# Altium PCB POWER PCB.PcbDoc (part 1 of 2)
Units mil, origin at the board's own origin, x right, y up, seen from the top; angles counter-clockwise.
Board outline 3944.91 x 1977.9 mil, 2 copper layers (Top Layer, Bottom Layer); 41 components, 26 nets, 102 pads, 0 vias.
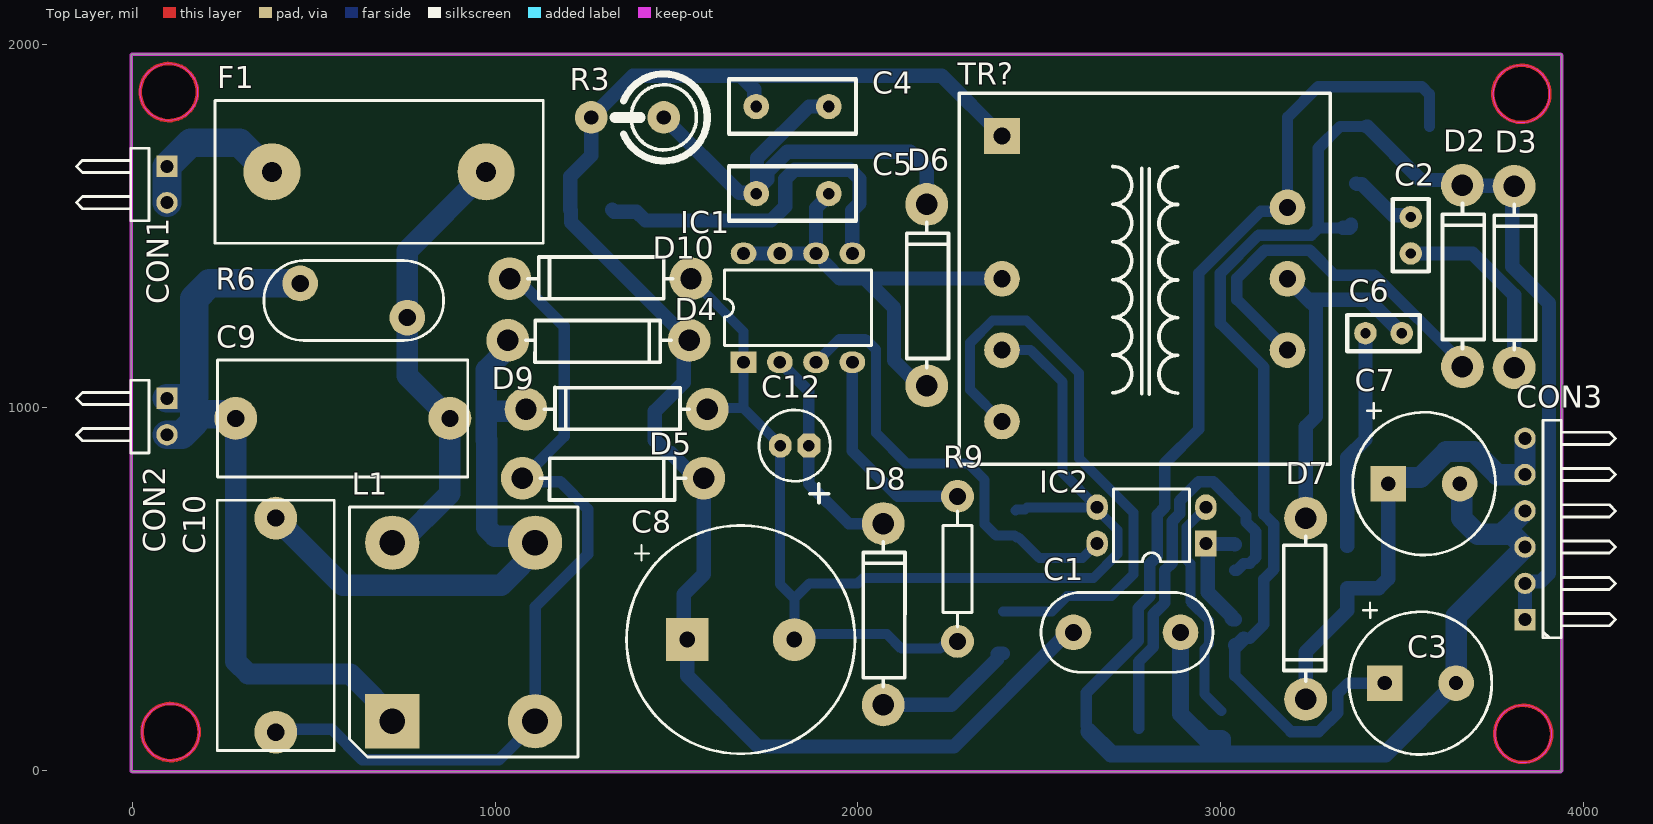
[diagram p0: Top Layer view]
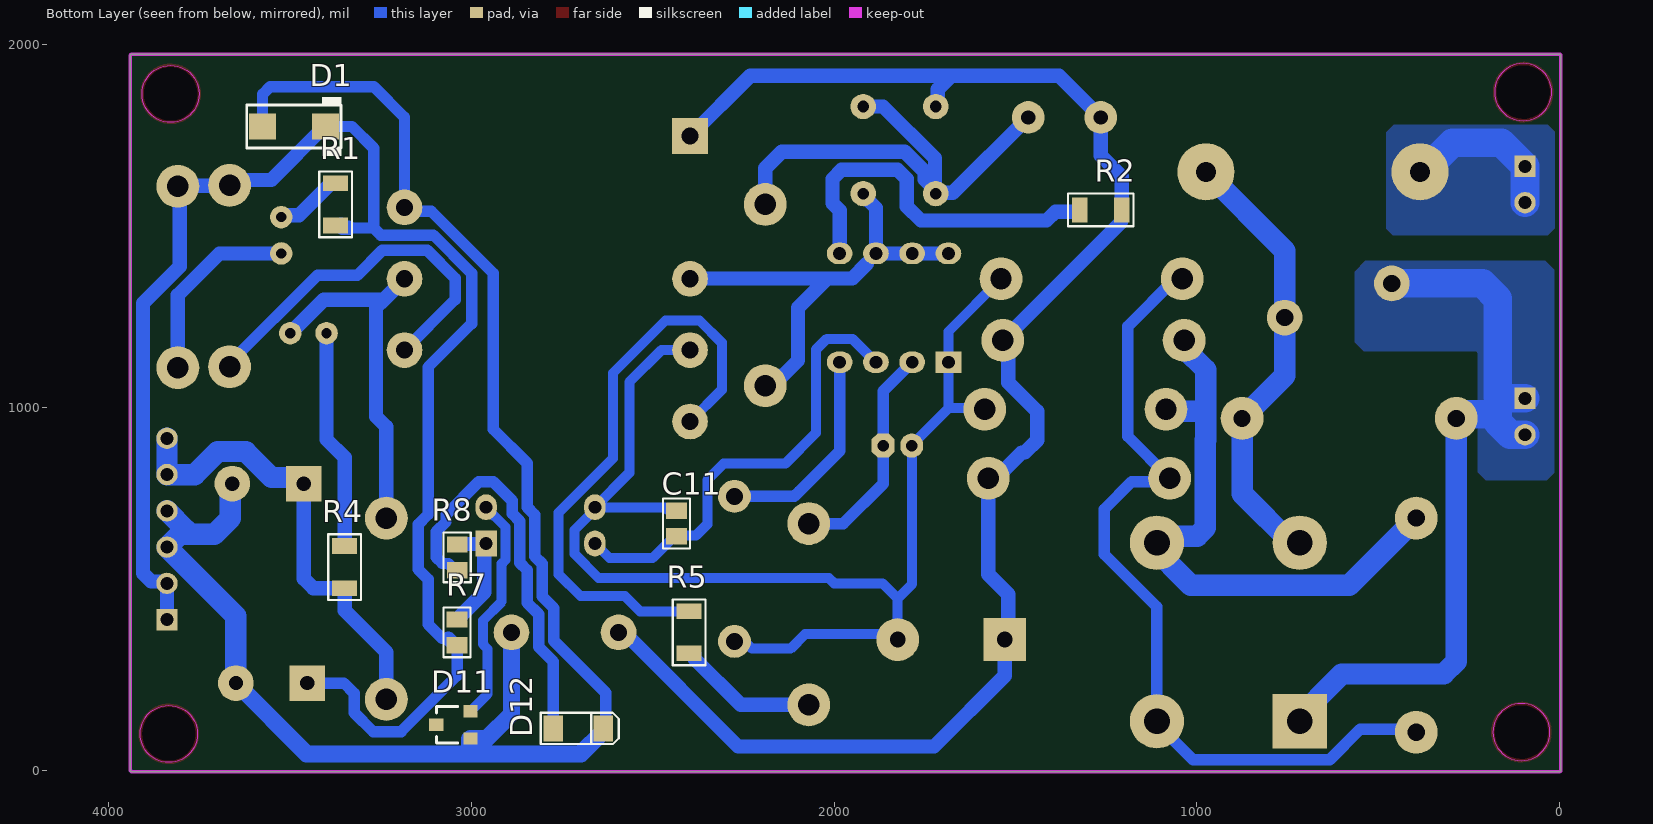
[diagram p1: Bottom Layer view, seen from below]
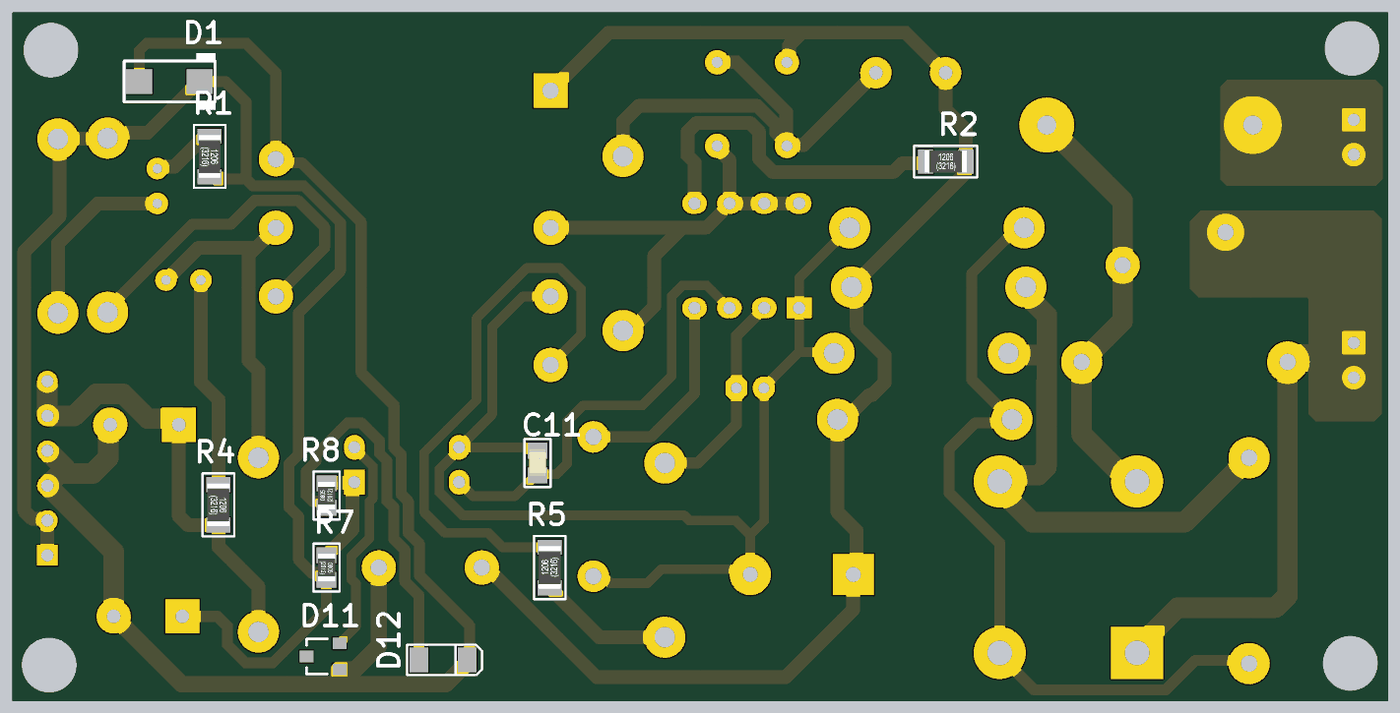
[diagram p2: 3D render of the assembled board from below, using the file's embedded part models]

## Layer stack, top to bottom
Top Solder: solder mask 0.4, Solder Resist, Dk 3.5
Top Layer: signal copper 1.4
Dielectric 1: dielectric 12.6, FR-4, Dk 4.8
Bottom Layer: signal copper 1.4
Bottom Solder: solder mask 0.4, Solder Resist, Dk 3.5

## Board outline
-3.88,0.75 cw(c0,1.5) -3.95,1.5 -3.95,1970 cw(c0,1970) 0,1973.95 3937.01,1973.95 cw(c3937.01,1970) 3940.96,1970 cw(c3937.01,1970) 3940.89,1969.25 cw(c3937.01,1968.5) 3940.96,1968.5 3940.96,0 cw(c3937.01,0) 3937.01,-3.95 0,-3.95 cw(c0,0)
cut-out: 3756.26,100 ccw(c3835,100) 3835,21.26 ccw(c3835,100) 3913.74,100 ccw(c3835,100) 3835,178.74 ccw(c3835,100)
cut-out: 3751.26,1865 ccw(c3830,1865) 3830,1786.26 ccw(c3830,1865) 3908.74,1865 ccw(c3830,1865) 3830,1943.74 ccw(c3830,1865)
cut-out: 105,26.26 cw(c105,105) 26.26,105 cw(c105,105) 105,183.74 cw(c105,105) 183.74,105 cw(c105,105)
cut-out: 100,1791.26 cw(c100,1870) 21.26,1870 cw(c100,1870) 100,1948.74 cw(c100,1870) 178.74,1870 cw(c100,1870)

## Design rules (kind name [scope] priority, off if disabled: settings)
Clearance [All] p1: gap=10 ignorepadtopadclearanceinfootprint=FALSE except(0: Arc-Hole Track-Hole SMDPad-Hole THPad-Hole Via-Hole Fill-Hole Poly-Hole Region-Hole Text-Hole)
PlaneConnect [All] p1: planeconnectstyle=Direct reliefexpansion=20 reliefentries=4 reliefconductorwidth=10 reliefairgap=10
PolygonConnect [All] p1: connectstyle=Direct reliefconductorwidth=10 reliefentries=4 polygonreliefangle="90 Angle" airgapwidth=10
RoutingVias [All] p1: holewidth=28 width=50 viastyle="Through Hole" minholewidth=28 minwidth=50 maxholewidth=28 maxwidth=50
SolderMaskExpansion [All] p1: expansion=4 istentingtop=FALSE
Width [All] p1: maxlimit=100 minlimit=10 preferedwidth=10 minimp=50.000000 maximp=50.000000 favimp=50.000000
29 further rules are at their usual default settings.

## Components (designator, comment, footprint, x,y, rotation, side; value= is the part's Value field where it differs from the comment)
C1 "2.2nF" 7.5X10MM 2594.72,380 r0 top value=2.2NF
C2 "220pF" 2.54X5.5MM 3525,1425 r90 top
C3 "470uF" RAD5X10X16 3453.15,240 r0 top
C4 "4.7nF" 5.08X12.5MM 1920,1830 r180 top
C5 "100pF" 5.08X12.5MM 1920,1590 r180 top
C6 "220pF" 2.54X5.5MM 3500,1205 r180 top
C7 "470uF" RAD5X10X16 3463.15,790 r0 top
C8 "22uF" RAD7.5X16X26 1529.72,360 r0 top
C9 "150nF" MKPX2-15MM 284.45,970 r0 top value=0.15uF
C10 "150nF" MKPX2-15MM 395,104.45 r90 top value=0.15uF
C11 "100nF" CAPC2012X14N(0805) 2435,680 r270 bottom value=0.1UF
C12 "22uF" RAD2X5X11 1865,895 r180 top
CON1 "1x2 Header" HEADER-1X2H 95,1665 r270 top
CON2 "1x2 Header" HEADER-1X2H 95,1025 r270 top
CON3 "1x6 Header" HEADER-1X6H 3840,415 r90 top
D1 "SMAJ24A-TR" DO-214AC-NEVA 3490,1775 r0 bottom
D2 "1N4937" DO-41 3667.5,1112.5 r90 top
D3 "1N4937" DO-41 3810,1110 r90 top
D4 "1N4007" DO-41 1035,1185 r0 top
D5 "1N4007" DO-41 1075,805 r0 top
D6 "1N4007" DO-41 2190,1060 r90 top
D7 "1N4937" DO-41 3235,695 r270 top
D8 "1N4937" DO-41 2070,180 r90 top
D9 "1N4007" DO-41 1585,995 r180 top
D10 "1N4007" DO-41 1540,1355 r180 top
D11 "BZX84-B22" SOT23 3050,125 r180 bottom
D12 "BZV55-B22V" SOD-80C 2706.1,115 r0 bottom
F1 "Fuse" "707001-FUSE HOLDER" 384.45,1650 r0 top
IC1 "Switch" DIP-8 1685,1125 r0 top
IC2 "PC817-B" DIP-4 2960,625 r90 top
L1 "Filter" "LİNE FİLTER 2x33MH" 716.3,135 r0 top value=2X3900µH
R1 "100R" RESC3216X84N(1206) 3375,1560 r270 bottom
R2 "56K" RESC3216X84N(1206) 1265,1545 r180 bottom
R3 "100K" "VERTICAL RES-AX0.7" 1465,1800 r180 top
R4 "100R" RESC3216X84N(1206) 3350,560 r270 bottom
R5 "100R" RESC3216X84N(1206) 2400,380 r90 bottom
R6 "320VAC" VARISTOR-320V-10mm 610,1295 r0 top
R7 "680R" RESC2013X70N(0805) 3040,380 r270 bottom
R8 "1K" RESC2013X70N(0805) 3039.73,586.79 r90 bottom
R9 "6.8K" AXIAL0.4 2275,355 r90 top
TR? "Transformer" TRAFO-24X25X18MM 2397.6,1748.7 r0 top

## Footprints (in the part's own frame and the unit in brackets; to place one, negate y for a bottom-side part, rotate by r counter-clockwise, add the part's x,y. Pads: shape width x height; smd on the part's side, far side on the other; paste and mask are expansions set on the pad)
2.54X5.5MM [mil] "Body 5X2.54mm, Pitch:2.54mm"
  round 62 hole 28: 1(0,0) 2(100,0)
  silkscreen extent -50,-50 150,50
5.08X12.5MM [mil] "body:8.9x3.81mm (W x L) Pitch:5.08mm"
  round 70 hole 32: 1(0,0) 2(200,0)
  silkscreen extent -75,-75 275,75
7.5X10MM [mm] "Body 12X5.6mm, Pitch:7.5mm"
  round 2.5 hole 1.2: 1(0,0) 2(7.5,0)
  silkscreen extent -2.26,-2.8 9.76,2.8
"707001-FUSE HOLDER" [mm] "Body:22.8X8.1 mm (W x L)"
  round 4 hole 1.4: 1(0,0) 2(15,0)
  silkscreen extent -4,-5 19,5
AXIAL0.4 [mm] "body:3.5 X 10 mm( D  x L ) Pitch:10.16 mm (400mil)"
  round 2.3 hole 1.2: 1(0,0) 2(10.16,0)
  silkscreen extent 1.02,-1.02 9.14,1.02
CAPC2012X14N(0805) [mm] "Chip Capacitor, 2-Leads, Body 2,00x1,25mm, IPC Medium Density"
  rect 1.15x1.45 smd: 1(-0.9,0) 2(0.9,0)
  silkscreen extent -1.75,-0.95 1.75,0.95, body extent -1.03,-0.62 0.97,0.63, height 1.38
DIP-4 [mm] "Body: 7.6 X 6.5 mm (L x W)  Pitch:2.54 mm"
  rect 1.8x1.5 hole 0.9: 1(0,0)
  oval 1.8x1.5 hole 0.9: 2(2.54,0) 3(2.54,7.62) 4(0,7.62)
  silkscreen extent -1.28,1.16 3.82,6.46
DIP-8 [mm] "8-Pin DIP Body: 5.3 X 10.3 mm (W x L)  pitch:2.54mm"
  rect 1.8x1.5 hole 0.9: 1(0,0)
  oval 1.8x1.5 hole 0.9: 2(2.54,0) 3(5.08,0) 4(7.62,0) 5(7.62,7.62) 6(5.08,7.62) 7(2.54,7.62) 8(0,7.62)
  silkscreen extent -1.34,1.16 8.96,6.46
DO-41 [mm] "body: 13 X3 mm (W x L) Pitch:12.7mm"
  round 3 hole 1.5: 1(0,0) 2(12.7,0)
  silkscreen extent 1.27,-1.53 11.43,1.4
DO-214AC-NEVA [mm] "Body;5.84X 3.04mm (WxL),Pitch 4.4mm"
  rect 1.9x1.8 smd: 1(2.2,0) 2(-2.2,0)
  silkscreen extent -3.35,-2.06 3.3,2.06
HEADER-1X2H [mm] "Connector; Header; 2 Position; Right Angle"
  rect 1.5x1.5 hole 0.9: 1(0,0)
  round 1.5 hole 0.9: 2(2.54,0)
  silkscreen extent -1.27,-6.35 3.81,-1.27
HEADER-1X6H [mm] "Connector; Header; 6 Position; Right Angle"
  rect 1.5x1.5 hole 0.9: 1(0,0)
  round 1.5 hole 0.9: 2(2.54,0) 3(5.08,0) 4(7.62,0) 5(10.16,0) 6(12.7,0)
  silkscreen extent -1.27,-6.35 13.97,-1.27
"LİNE FİLTER 2x33MH" [mm]
  rect 3.8x3.8 hole 1.8: 1(0,0)
  round 3.8 hole 1.8: 2(10,0) 3(10,12.5) 4(0,12.5)
  silkscreen extent -3,-2.5 13,15
MKPX2-15MM [mm] "Metallized Polypropylene Film Capacitor;Body 15x12mm (P X H)"
  round 3 hole 1.2: 1(0,0) 2(15,0)
  silkscreen extent -1.27,-4.1 16.26,4.1
RAD2X5X11 [mm] "Capacitor, Electrolytic, Radial; Body 5 x 11 mm (Dia.xL typ); Pin Spacing 2 mm (typ)"
  oct 1.6x1.7 hole 0.8: 1(0,0)
  oval 1.6x1.7 hole 0.8: 2(2,0)
  silkscreen extent -1.5,-2.5 3.5,4.01
RAD5X10X16 [mm] "Capacitor, Electrolytic, Radial; Body 10 x 16 mm (Dia.xL typ); Pin Spacing 5 mm (typ)"
  rect 2.5x2.5 hole 1: 1(0,0)
  round 2.5 hole 1: 2(5,0)
  silkscreen extent -2.5,-5 7.5,5.64
RAD7.5X16X26 [mm] "Capacitor, Electrolytic, Radial; Body 16 x 26 mm (Dia.xL typ); Pin Spacing 7.5 mm (typ)"
  rect 3x3 hole 1.1: 1(0,0)
  round 3 hole 1.1: 2(7.5,0)
  silkscreen extent -4.25,-8 11.75,8
RESC2013X70N(0805) [mm] "Chip Resistor, 2-Leads, Body 2,00x1,25mm, IPC Medium Density"
  rect 1.15x1.45 smd: 1(-0.9,0) 2(0.9,0)
  silkscreen extent -1.75,-0.95 1.75,0.95, body extent -1,-0.62 1,0.63, height 0.48
RESC3216X84N(1206) [mm] "Chip Resistor, 2-Leads, Body 3,20x1,60mm, IPC Medium Density"
  rect 1.1x1.75 smd: 1(-1.475,0) 2(1.475,0)
  silkscreen extent -2.3,-1.15 2.3,1.15, body extent -1.55,-0.8 1.55,0.8, height 0.67
SOD-80C [mm] "body:3.5 X 1.45 mm (L x W)  Pitch:3.5mm"
  rect 1.37x1.8 smd: 1(-1.75,0) 2(1.75,0)
  silkscreen extent -2.84,-1.1 2.62,1.1
SOT23 [mm] "SOT-23; 3 Leads; Body 3.0 x 2.5 mm, inc. leads (LxW max)"
  rect 1x0.85 smd: 1(1.2,-0.95) 2(1.2,0.95) 3(-1.2,0)
  silkscreen extent -1.2,-1.27 0.3,1.28
TRAFO-24X25X18MM [mm] "Body:24/25/18 mm (W x L x H) Pitch:4mm-15.2mm"
  rect 2.5x2.5 hole 1.2: 1(0,0)
  round 2.5 hole 1.2: 3(0,-10) 4(0,-15) 5(0,-20) 7(20,-15) 8(20,-10) 9(20,-5)
  silkscreen extent -3,-23 23,3
VARISTOR-320V-10mm [mm] "body:15.5 X 5.4 mm (W x L)   Pitch:7.5mm"
  round 2.5 hole 1.2: 1(-3.75,1.2) 2(3.75,-1.2)
  silkscreen extent -6.3,-2.8 6.3,2.8
"VERTICAL RES-AX0.7" [mil] "Dia:6 mm  Pitch:5mm"
  round 90 hole 39: 1(0,0) 2(200,0)
  silkscreen extent -120,-120 135,120

## Part data
C1: library part C0805C222KARACAUTO, "KEMET - C0805C222KARACAUTO - KONDENSATOR 2200PF 250V 10% X7R 0805", Case/Package=0805, Dielectric=X7R, Dielectric Material=Ceramic, Manufacturer=KEMET, Max Operating Temperature=125°C, Min Operating Temperature=-55°C, Supplier Part Number 1=80-C0805C222KARAUTO, Tolerance=10%, Voltage Rating (DC)=250V, Capacitance=2.2nF, Category="Ceramic Capacitors", Component=1, ComponentLink1Description=http://www.farnell.com/datasheets/2571517.pdf?src-supplier=Farnell, ComponentLink1URL=http://www.farnell.com/datasheets/2571517.pdf?src-supplier=Farnell, ComponentLink2Description=https://api.kemet.com/component-edge/download/specsheet/C0805C222KARACAUTO.pdf?src-supplier=Digi-Key, ComponentLink2URL=https://api.kemet.com/component-edge/download/specsheet/C0805C222KARACAUTO.pdf?src-supplier=Digi-Key, ComponentLink3Description=https://api.kemet.com/component-edge/download/datasheet/C0805C222KARACAUTO.pdf?src-supplier=Digi-Key, ComponentLink3URL=https://api.kemet.com/component-edge/download/datasheet/C0805C222KARACAUTO.pdf?src-supplier=Digi-Key, ComponentLink4Description=http://www.farnell.com/datasheets/2571517.pdf?src-supplier=Newark, ComponentLink4URL=http://www.farnell.com/datasheets/2571517.pdf?src-supplier=Newark, Depth=1.2mm, Height=0.78mm, Length=2mm, Manufacturer Part Number=C0805C222KARACAUTO, Mount="Surface Mount", Pricing 1="1=0,27000, 10=0,11200, 100=0,09400, 500=0,06400, 1000=0,05700, 4000=0,04500 (USD)", RoHS=Yes, Stock 1=6702, Supplier 1=Mouser
C2 C6: library part C0805C221KCRACTU, "KEMET 220pF Multilayer Ceramic Capacitor (MLCC) 500 V dc 10% X7R dielectric C SMT max op. temp. +125C", Case Code (Metric)=2012, Case Code (Imperial)=0805, Dielectric=X7R, Dielectric Material=Ceramic, Manufacturer=KEMET, Max Operating Temperature=125°C, Min Operating Temperature=-55°C, Package Quantity=1, Supplier Part Number 1=80-C0805C221KCR, Tolerance=10%, Voltage=500V, Capacitance=220pF, Case/Package=0805, Category="Ceramic Capacitors", Component=2, ComponentLink1Description=https://datasheet.ciiva.com/14606/70096142-14606492.pdf?src-supplier=Allied+Electronics, ComponentLink1URL=https://datasheet.ciiva.com/14606/70096142-14606492.pdf?src-supplier=Allied+Electronics, Depth=1.2mm, Dissipation Factor=2.5%, Height=1.25mm, Length=2mm, Manufacturer Part Number=C0805C221KCRACTU, Mount="Surface Mount,PCB", Number of Pins=2, Packaging="Tape and Reel", Pricing 1="1=0,37000, 10=0,21600, 100=0,15700, 500=0,13900, 1000=0,11800, 2500=0,09500 (USD)", RoHS=Yes, Stock 1=17842, Supplier 1=Mouser, Termination=SMD/SMT, Thickness=0.055inch, Voltage Rating=500V, Voltage Rating (DC)=500V, Width=0.049inch
C3 C7: library part ADT-AMP1251106S4BS165A1, "Cap Aluminum 470uF 35V 20% (10 X 16mm) Radial 5mm 1790mA 8000 hr 105°C Ammo Pack", Case/Package=Radial, ESR (Equivalent Series Resistance)=28mR, Manufacturer="Adam Equipment", Max Operating Temperature=105°C, Min Operating Temperature=-40°C, Package Quantity=500, Ripple Current=1.79A, Supplier Part Number 1=P15391CT-ND, Temperature Coefficient=350ppm/°C, Tolerance=20%, Voltage Rating=35V, Insulation Resistance=10GR, Capacitance=470uF, Category="Aluminum Electrolytic Capacitors", Component=11, ComponentLink1Description=https://datasheet.ciiva.com/7718/59374-7718894.pdf?src-supplier=Element14, ComponentLink1URL=https://datasheet.ciiva.com/7718/59374-7718894.pdf?src-supplier=Element14, Dissipation Factor=0.12%, Lead Diameter=0.65mm, Lead Length=25mm, Lead Pitch=5mm, Life (Hours)=8000Hour, Manufacturer Part Number=ADT-AMP1251106S4BS165A1, Mount="Through Hole", Number of Pins=2, Packaging="Tape and Reel", Pricing 1="1=0,69000, 10=0,50800, 50=0,40620, 100=0,34820 (USD)", REACH SVHC="No SVHC", RoHS=No, Stock 1=492, Supplier 1=Digi-Key, Termination=Radial, Voltage Rating (DC)=35V, Impedance=28mR
C4: library part C0805C472KARACAUTO, "KEMET - C0805C472KARACAUTO - Keramikvielschichtkondensator, SMD, 4700 pF, 250 V, 0805 [Metrisch 2012], ± 10%, X7R", Case Code (Metric)=2012, Case Code (Imperial)=0805, Dielectric=X7R, Manufacturer=KEMET, Max Operating Temperature=125°C, Min Operating Temperature=-55°C, Package Quantity=4000, Supplier Part Number 1=80-C0805C472KARAUTO, Tolerance=10%, Voltage Rating=250V, Capacitance=4.7nF, Case/Package=0805, Category=Capacitors, Component=4, ComponentLink1Description=http://www.mouser.com/ds/2/212/KEM_C1023_X7R_AUTO_SMD-1093309.pdf?src-supplier=Mouser, ComponentLink1URL=http://www.mouser.com/ds/2/212/KEM_C1023_X7R_AUTO_SMD-1093309.pdf?src-supplier=Mouser, ComponentLink2Description=http://www.farnell.com/datasheets/2747493.pdf?src-supplier=Farnell, ComponentLink2URL=http://www.farnell.com/datasheets/2747493.pdf?src-supplier=Farnell, ComponentLink3Description=http://www.farnell.com/datasheets/2747493.pdf?src-supplier=Element14, ComponentLink3URL=http://www.farnell.com/datasheets/2747493.pdf?src-supplier=Element14, ComponentLink4Description=https://api.kemet.com/component-edge/download/specsheet/C0805C472KARACAUTO.pdf?src-supplier=Digi-Key, ComponentLink4URL=https://api.kemet.com/component-edge/download/specsheet/C0805C472KARACAUTO.pdf?src-supplier=Digi-Key, ComponentLink5Description=http://www.farnell.com/datasheets/2747493.pdf?src-supplier=Newark, ComponentLink5URL=http://www.farnell.com/datasheets/2747493.pdf?src-supplier=Newark, Height=1.25mm, Length=2mm, Manufacturer Part Number=C0805C472KARACAUTO, Packaging="Tape and Reel", Pricing 1="1=0,28000, 10=0,11500, 100=0,09700, 500=0,06700, 1000=0,05900, 4000=0,04600 (USD)", RoHS=Yes, Stock 1=3353, Supplier 1=Mouser, Termination=SMD/SMT, Voltage Rating (DC)=250V, Width=1.2mm
C5: library part C0805C101KDRACTU, "CAP CER 100PF 1KV X7R 0805", Case Code (Metric)=2012, Case Code (Imperial)=0805, Dielectric=X7R, Dielectric Material=Ceramic, Manufacturer=KEMET, Max Operating Temperature=125°C, Min Operating Temperature=-55°C, Package Quantity=1, Supplier Part Number 1=80-C0805C101KDRACTU, Tolerance=10%, Voltage Rating=1kV, Voltage Rating (DC)=1.5kV, Capacitance=100pF, Case/Package=0805, Category="Ceramic Capacitors", Component=5, ComponentLink1Description=http://www.farnell.com/datasheets/2315402.pdf?src-supplier=Farnell, ComponentLink1URL=http://www.farnell.com/datasheets/2315402.pdf?src-supplier=Farnell, ComponentLink2Description=http://components.arrow.com/part/dataview/0323_00070989?src-supplier=Arrow+Europe, ComponentLink2URL=http://components.arrow.com/part/dataview/0323_00070989?src-supplier=Arrow+Europe, ComponentLink3Description=http://www.mouser.com/ds/2/212/KEM_C1010_X7R_HV_SMD-1102742.pdf?src-supplier=Mouser, ComponentLink3URL=http://www.mouser.com/ds/2/212/KEM_C1010_X7R_HV_SMD-1102742.pdf?src-supplier=Mouser, ComponentLink4Description=https://search.kemet.com/component-edge/download/datasheet/C0805C101KDRACTU.pdf?src-supplier=Digi-Key, ComponentLink4URL=https://search.kemet.com/component-edge/download/datasheet/C0805C101KDRACTU.pdf?src-supplier=Digi-Key, ComponentLink5Description=https://api.kemet.com/component-edge/download/datasheet/C0805C101KDRACTU.pdf?src-supplier=Digi-Key, ComponentLink5URL=https://api.kemet.com/component-edge/download/datasheet/C0805C101KDRACTU.pdf?src-supplier=Digi-Key, Depth=1.25mm, Height=1.25mm, Length=2mm, Manufacturer Part Number=C0805C101KDRACTU, Mount="Surface Mount", Packaging="Tape and Reel", Pricing 1="1=0,52000, 10=0,31300, 100=0,18900, 500=0,16100, 1000=0,13900, 2500=0,10000 (USD)", Radiation Hardening=No, RoHS=Yes, Stock 1=2330, Supplier 1=Mouser, Termination=SMD/SMT, Thickness=0.055inch, Width=0.049inch
C8: library part PEG124YH2220QL1, "Aluminum Electrolytic Capacitors - Leaded 22uF 450VDC -10% to 30%", Case/Package=Axial, Dielectric Material=Aluminium, ESR (Equivalent Series Resistance)=2.4R, Leakage Current=63.4uA, Manufacturer=KEMET, Max Operating Temperature=125°C, Min Operating Temperature=-40°C, Package Quantity=150, Ripple Current=240mA, Supplier Part Number 1=80-PEG124YH2220QL1, Tolerance=30%, Voltage=450V, Capacitance=22uF, Category="Aluminum Electrolytic Capacitors", Component=6, ComponentLink1Description=https://www.distrelec.biz/Web/Downloads/at/_e/xwPEG124xxx_dat_e.pdf?mime=application%2Fpdf&src-supplier=Distrelec, ComponentLink1URL=https://www.distrelec.biz/Web/Downloads/at/_e/xwPEG124xxx_dat_e.pdf?mime=application%2Fpdf&src-supplier=Distrelec, ComponentLink2Description=http://components.arrow.com/part/dataview/0323_01891001?src-supplier=Arrow+Europe, ComponentLink2URL=http://components.arrow.com/part/dataview/0323_01891001?src-supplier=Arrow+Europe, ComponentLink3Description=http://www.alliedelec.com/m/d/cbb45dc6290b6e87b76194cff6cccb64.pdf?src-supplier=Allied+Electronics, ComponentLink3URL=http://www.alliedelec.com/m/d/cbb45dc6290b6e87b76194cff6cccb64.pdf?src-supplier=Allied+Electronics, ComponentLink4Description=http://www.mouser.com/ds/2/212/KEM_A4011_PEG124-1104316.pdf?src-supplier=Mouser, ComponentLink4URL=http://www.mouser.com/ds/2/212/KEM_A4011_PEG124-1104316.pdf?src-supplier=Mouser, ComponentLink5Description=http://uk.rs-online.com/webdocs/00ab/0900766b800abff0.pdf?src-supplier=RSComponents, ComponentLink5URL=http://uk.rs-online.com/webdocs/00ab/0900766b800abff0.pdf?src-supplier=RSComponents, ComponentLink6Description=http://capacitoredge.kemet.com/capedge2/DataSheet?pn=A142ML220Q450A&src-supplier=Avnet, ComponentLink6URL=http://capacitoredge.kemet.com/capedge2/DataSheet?pn=A142ML220Q450A&src-supplier=Avnet, ComponentLink7Description=http://capacitoredge.kemet.com/capedge2/DataSheet?pn=A142ML220Q450A&src-supplier=Avnet+Europe, ComponentLink7URL=http://capacitoredge.kemet.com/capedge2/DataSheet?pn=A142ML220Q450A&src-supplier=Avnet+Europe, Diameter=20mm, Lead Diameter=0.8mm, Lead Length=42mm, Length=29mm, Manufacturer Part Number=PEG124YH2220QL1, Mount="Through Hole", Packaging=Bulk, Pricing 1="1=5,43000, 10=4,97000, 50=4,50000, 100=4,13000, 250=3,74000, 500=3,73000 (USD)", Radiation Hardening=No, RoHS=Yes, Stock 1=959, Supplier 1=Mouser, Termination=Axial, Voltage Rating=450V, Voltage Rating (DC)=450V
C9 C10: library part ECQ-UAAF154M, "Cap Film 0.15uF 275VAC PP 20% (17.5 X 6 X 13mm) Radial 15mm 110C Bulk", Case/Package=Radial, Dielectric=PP, Manufacturer=Panasonic, Max Operating Temperature=110°C, Min Operating Temperature=-40°C, Package Quantity=100, Supplier Part Number 1=667-ECQ-UAAF154M, Tolerance=20%, Voltage=275V, Capacitance=150nF, Category="Film Capacitors", Component=7, ComponentLink1Description=https://datasheet.ciiva.com/11792/0900766b80fb6a81-11792240.pdf?src-supplier=RSComponents, ComponentLink1URL=https://datasheet.ciiva.com/11792/0900766b80fb6a81-11792240.pdf?src-supplier=RSComponents, ComponentLink2Description=https://datasheet.ciiva.com/46399/1382881-46399669.pdf?src-supplier=Element14, ComponentLink2URL=https://datasheet.ciiva.com/46399/1382881-46399669.pdf?src-supplier=Element14, ComponentLink3Description=https://datasheet.ciiva.com/17632/abd0000ce53-17632333.pdf?src-supplier=Avnet+Europe, ComponentLink3URL=https://datasheet.ciiva.com/17632/abd0000ce53-17632333.pdf?src-supplier=Avnet+Europe, ComponentLink4Description=https://datasheet.ciiva.com/30066/47abd0000ce53-30066232.pdf?src-supplier=Onlinecomponents.com, ComponentLink4URL=https://datasheet.ciiva.com/30066/47abd0000ce53-30066232.pdf?src-supplier=Onlinecomponents.com, Contact Plating=Tin, Depth=6mm, Dielectric Material=PP, Height=13mm, Height - Seated (Max)=0.531inch, Lead Diameter=0.6mm, Lead Pitch=15mm, Lead/Base Style=Straight, Length=17.5mm, Manufacturer Part Number=ECQ-UAAF154M, Mount="Through Hole", Number of Pins=2, Packaging=Bulk, Pricing 1="1=0,48000, 10=0,34000, 100=0,22400, 500=0,16600, 1000=0,14100, 2000=0,12400 (USD)", Radiation Hardening=No, REACH SVHC="No SVHC", RoHS=Yes, Stock 1=1407, Supplier 1=Mouser, Termination=Radial, Voltage Rating (AC)=275V, Width=0.236inch
C11: library part CGA3E2X7R1H104K080AA, "TDK - CGA3E2X7R1H104K080AA. - CERAMIC CAPACITOR, 0.1UF, 50V, X7R, 0603, FULL REEL", Case Code (Metric)=1608, Case Code (Imperial)=0603, Dielectric=X7R, Manufacturer=TDK, Max Operating Temperature=125°C, Min Operating Temperature=-55°C, Package Quantity=1, Ratings=AEC-Q200, Supplier Part Number 1=810-CGA3E2X7R1H104K, Tolerance=10%, Voltage=50V, Capacitance=100nF, Case/Package=0603, Category="Ceramic Capacitors", Component=8, ComponentLink1Description=https://datasheet.ciiva.com/24216/cga3e2x7r1h104k080aa-266291-24216208.pdf?src-supplier=Mouser, ComponentLink1URL=https://datasheet.ciiva.com/24216/cga3e2x7r1h104k080aa-266291-24216208.pdf?src-supplier=Mouser, ComponentLink2Description=https://datasheet.ciiva.com/15192/getdatasheetpartid-715867-15192412.pdf?src-supplier=Verical, ComponentLink2URL=https://datasheet.ciiva.com/15192/getdatasheetpartid-715867-15192412.pdf?src-supplier=Verical, ComponentLink3Description=https://datasheet.ciiva.com/16500/mlccspec-automotive-general-midvoltage-en-16500693.pdf?src-supplier=Future+Electronics, ComponentLink3URL=https://datasheet.ciiva.com/16500/mlccspec-automotive-general-midvoltage-en-16500693.pdf?src-supplier=Future+Electronics, ComponentLink4Description=https://datasheet.ciiva.com/22725/1735392-22725642.pdf?src-supplier=Element14, ComponentLink4URL=https://datasheet.ciiva.com/22725/1735392-22725642.pdf?src-supplier=Element14, ComponentLink5Description=https://datasheet.ciiva.com/23803/1936565-23803084.pdf?src-supplier=Newark, ComponentLink5URL=https://datasheet.ciiva.com/23803/1936565-23803084.pdf?src-supplier=Newark, ComponentLink6Description=https://datasheet.ciiva.com/46385/1735392-46385708.pdf?src-supplier=Element14, ComponentLink6URL=https://datasheet.ciiva.com/46385/1735392-46385708.pdf?src-supplier=Element14, Composition=Ceramic, Depth=0.8mm, Height=0.8mm, Lead Free="Lead Free", Length=1.6mm, Manufacturer Part Number=CGA3E2X7R1H104K080AA, Mount="Surface Mount", Packaging="Tape and Reel", Pricing 1="1=0,11000, 10=0,07900, 100=0,03500, 500=0,02500, 1000=0,01900, 4000=0,01300 (USD)", Radiation Hardening=No, REACH SVHC="No SVHC", RoHS=Yes, Stock 1=5553529, Supplier 1=Mouser, Termination=SMD/SMT, Thickness=0.035inch, Voltage Rating=50V, Voltage Rating (DC)=50V, Weight=7.1E-05oz, Width=0.8mm
C12: library part EEE-1VA220SP, "CAP, ALU ELEC, 22UF, 35V, SMD", Case/Package=Radial, Dielectric Material=Aluminium, Leakage Current=3uA, Manufacturer=Panasonic, Max Operating Temperature=85°C, Min Operating Temperature=-40°C, Package Quantity=1, Ripple Current=60mA, Supplier Part Number 1=PCE3952CT-ND, Tolerance=20%, Voltage=35V, Capacitance=22uF, Category="Aluminum Electrolytic Capacitors", Component=21, ComponentLink1Description=https://datasheet.ciiva.com/11778/0900766b8078636e-11778914.pdf?src-supplier=RSComponents, ComponentLink1URL=https://datasheet.ciiva.com/11778/0900766b8078636e-11778914.pdf?src-supplier=RSComponents, ComponentLink2Description=https://datasheet.ciiva.com/15166/getdatasheetpartid-135375-15166031.pdf?src-supplier=Verical, ComponentLink2URL=https://datasheet.ciiva.com/15166/getdatasheetpartid-135375-15166031.pdf?src-supplier=Verical, ComponentLink3Description=https://datasheet.ciiva.com/6085/aba0000ce2-6085109.pdf?src-supplier=Farnell, ComponentLink3URL=https://datasheet.ciiva.com/6085/aba0000ce2-6085109.pdf?src-supplier=Farnell, ComponentLink4Description=https://datasheet.ciiva.com/46376/aba0000ce2-46376415.pdf?src-supplier=Element14, ComponentLink4URL=https://datasheet.ciiva.com/46376/aba0000ce2-46376415.pdf?src-supplier=Element14, Contact Plating=Tin, Diameter=6.3mm, Height=5.4mm, Height - Seated (Max)=0.213inch, Lead Free="Lead Free", Lead Length=2.6mm, Lead Pitch=1.8mm, Length=5.5mm, Life (Hours)=2000Hour, Manufacturer Part Number=EEE-1VA220SP, Mount="Surface Mount,PCB", Number of Pins=2, Packaging="Tape and Reel", Pricing 1="1=0,33000, 10=0,23000, 50=0,16100, 100=0,13790, 500=0,10346 (USD)", Radiation Hardening=No, REACH SVHC="No SVHC", Ripple Current (AC)=60mA, RoHS=Yes, Stock 1=207, Supplier 1=Digi-Key, Termination=SMD/SMT, Voltage Rating=35V, Voltage Rating (DC)=35V, Width=6.6mm
CON1 CON2: library part OSTOQ025450, "TERM BLOCK HDR 2POS VERT 5.08MM", Color=Green, Manufacturer="On-Shore Technology", Max Operating Temperature=105°C, Min Operating Temperature=-30°C, Supplier Part Number 1=ED2843-ND, Category="Terminal Blocks", Component=7, Contact Plating=Tin, Manufacturer Part Number=OSTOQ025450, Mount="Through Hole", Number of Pins=2, Number of Positions=2, Packaging=Bulk, Pricing 1="1=0,51000, 10=0,28000, 25=0,20880, 50=0,18620, 100=0,18250, 250=0,16060, 500=0,14600, 1000=0,13140, 5000=0,09855 (USD)", RoHS=Yes, Stock 1=6008, Supplier 1=Digi-Key, Termination=Solder
CON3: library part TSW-106-07-L-S, "Conn Unshrouded Header HDR 6 POS 2.54mm Solder ST Thru-Hole", Color=Green, Current=10A, Current Rating=2A, Manufacturer=Samtec, Max Current Rating=Polyester, Max DC Current=Bronze, Max Operating Temperature=-55°C, Max Supply Current=15.24mm, Max Supply Voltage=Vertical, Min Operating Temperature=-30°C, Min Supply Voltage=6, Output Current=125°C, Package Quantity=10, Power Dissipation=1.6W, Self Resonant Frequency=7.6A, Supplier Part Number 1=200-TSW10607LS, Test Frequency=Black, Tolerance=Gold, Voltage=300V, Voltage Rating=250V, Inductance Tolerance=1, Body Material=Glass, Category="Headers and Wire Housings", Component=5, ComponentLink1Description=https://datasheet.ciiva.com/16723/htsw-th-16723150.pdf?src-supplier=Avnet+Europe, ComponentLink1URL=https://datasheet.ciiva.com/25618/0900766b81154476-25618441.pdf?src-supplier=RSComponents, ComponentLink2URL=https://datasheet.ciiva.com/16723/htsw-th-16723150.pdf?src-supplier=Avnet+Europe, ComponentLink3Description=https://datasheet.ciiva.com/794/ostoqxx3251-794870.pdf?src-supplier=Digi-Key, ComponentLink3URL=https://datasheet.ciiva.com/794/ostoqxx3251-794870.pdf?src-supplier=Digi-Key, ComponentLink4Description=550V, ComponentLink4URL=Bulk, ComponentLink5URL=https://datasheet.ciiva.com/48560/htsw-th-48560639.pdf?src-supplier=Avnet, ComponentLink6Description=https://datasheet.ciiva.com/794/ostoqxx5450-794868.pdf?src-supplier=Digi-Key, ComponentLink6URL=https://datasheet.ciiva.com/794/ostoqxx5450-794868.pdf?src-supplier=Digi-Key, ComponentLink7Description=http://www.mouser.com/ds/2/177/5c0054-77730.pdf?src-supplier=Mouser, ComponentLink7URL=http://www.mouser.com/ds/2/177/5c0054-77730.pdf?src-supplier=Mouser, Contact Plating=Tin, Depth=https://datasheet.ciiva.com/48561/htsw-th-48561118.pdf?src-supplier=Avnet, Halogen Free=https://datasheet.ciiva.com/25618/0900766b81154476-25618441.pdf?src-supplier=RSComponents, Height="No SVHC", Height - Seated (Max)=49.28mm, Housing Material=Glass, Lead Free=https://datasheet.ciiva.com/48560/htsw-th-48560639.pdf?src-supplier=Avnet, Length=No, Logic Function=2.54mm, Manufacturer Part Number=TSW-106-07-L-S, Max Output Current=https://datasheet.ciiva.com/23732/320951-23732070.pdf?src-supplier=Newark, Min Dual Supply Voltage=https://datasheet.ciiva.com/22677/82167-22677747.pdf?src-supplier=Element14, Mount=1, Number of Channels=https://datasheet.ciiva.com/22677/82167-22677747.pdf?src-supplier=Element14, Number of Circuits=7.6A, Number of Elements=0.23inch, Number of Levels=1, Number of Positions=2, Number of Positions Per Level=2, Number of Terminals=550V, Number of Inputs=Male, Orientation=Vertical, Packaging=Bulk, Pitch=0.15inch, Pricing 1="1=0,56000, 10=0,41900, 100=0,36700, 500=0,35000, 1000=0,28800, 2500=0,25300 (USD)", Propagation Delay="Male Pin", Radiation Hardening=https://datasheet.ciiva.com/48561/htsw-th-48561118.pdf?src-supplier=Avnet, REACH SVHC=https://datasheet.ciiva.com/23732/320951-23732070.pdf?src-supplier=Newark, RoHS=Yes, Shielding=Unshielded, Stock 1=2038, Stock 2=1, Supplier 1=Mouser, Supplier 2=Digi-Key, Supplier Part Number 2=HM2523-ND, Termination=Solder, Turn-On Delay Time=6, Voltage Rating (AC)=250V, Voltage Rating (DC)=250V, Weight=Solder, Width="Lead Free", Inductance=Black, Insertion Loss=1dB, Interface=2.54mm
D1: "STMICROELECTRONICS - SMAJ24A-TR - DIODE, TVS, 24V, 400W, UNI, SMA, RL", Breakdown Voltage=26.7V, Capacitance=600pF, Case/Package=SMA, Clamping Voltage=50V, Leakage Current=200nA, Manufacturer=STMicroelectronics, Max Breakdown Voltage=28.1V, Max Operating Temperature=150°C, Max Power Dissipation=3.3W, Max Surge Current=1mA, Min Operating Temperature=-55°C, Operating Supply Voltage=24V, Package Quantity=1, Peak Pulse Current=46A, Peak Pulse Power=400W, Power Line Protection=No, Supplier Part Number 1=497-12777-1-ND, Category="TVS Diodes", Component=29, ComponentLink1Description=https://datasheet.ciiva.com/15143/getdatasheetpartid-82957-15143307.pdf?src-supplier=Verical, ComponentLink1URL=https://datasheet.ciiva.com/15143/getdatasheetpartid-82957-15143307.pdf?src-supplier=Verical, ComponentLink2Description=https://datasheet.ciiva.com/7965/1724007-7965493.pdf?src-supplier=Element14, ComponentLink2URL=https://datasheet.ciiva.com/7965/1724007-7965493.pdf?src-supplier=Element14, ComponentLink3Description=https://datasheet.ciiva.com/16204/cd00001333-16204855.pdf?src-supplier=Future+Electronics, ComponentLink3URL=https://datasheet.ciiva.com/16204/cd00001333-16204855.pdf?src-supplier=Future+Electronics, ComponentLink4Description=https://datasheet.ciiva.com/46394/1724007-46394359.pdf?src-supplier=Element14, ComponentLink4URL=https://datasheet.ciiva.com/46394/1724007-46394359.pdf?src-supplier=Element14, ComponentLink5Description=https://datasheet.ciiva.com/337/cd00001333-337721.pdf?src-supplier=Digi-Key, ComponentLink5URL=https://datasheet.ciiva.com/337/cd00001333-337721.pdf?src-supplier=Digi-Key, ComponentLink6Description=https://datasheet.ciiva.com/337/cd00001333-337722.pdf?src-supplier=Digi-Key, ComponentLink6URL=https://datasheet.ciiva.com/337/cd00001333-337722.pdf?src-supplier=Digi-Key, ComponentLink7Description=https://datasheet.ciiva.com/337/cd00001333-337723.pdf?src-supplier=Digi-Key, ComponentLink7URL=https://datasheet.ciiva.com/337/cd00001333-337723.pdf?src-supplier=Digi-Key, ComponentLink8Description=https://datasheet.ciiva.com/41443/001183973-da-01-en-transil-400w-24v-smaj24a-tr-do-214ac-stm-41443285.pdf?src-supplier=Conrad, ComponentLink8URL=https://datasheet.ciiva.com/41443/001183973-da-01-en-transil-400w-24v-smaj24a-tr-do-214ac-stm-41443285.pdf?src-supplier=Conrad, Composition=Zener, Direction=Unidirectional, Element Configuration=Single, ESD Protection=Yes, Height=2.03mm, Lead Free="Lead Free", Length=4.6mm, Manufacturer Part Number=SMAJ24A-TR, Max Reverse Leakage Current=200nA, Min Breakdown Voltage=26.7V, Mount="Surface Mount", Number of Elements=1, Number of Pins=2, Number of Unidirectional Channels=1, Packaging="Tape and Reel", Polarity=Unidirectional, Power Dissipation=400W, Pricing 1="1=0,45000, 10=0,34200, 25=0,30840, 100=0,16270, 500=0,14418, 1000=0,11220, 2500=0,10266 (USD)", Radiation Hardening=No, REACH SVHC="No SVHC", Reverse Breakdown Voltage=26.7V, Reverse Standoff Voltage=24V, RoHS=Yes, Stock 1=27401, Supplier 1=Digi-Key, Termination=SMD/SMT, Test Current=1mA, Voltage Rating (DC)=24V, Width=2.95mm
D2 D3 D7 D8: library part STTH1L06A, "DIODE GEN PURP 600V 1A SMA", Average Rectified Current=1A, Case/Package=SMA, Forward Voltage=1.3V, Manufacturer=STMicroelectronics, Max Forward Surge Current (Ifsm)=10A, Max Operating Temperature=175°C, Max Repetitive Reverse Voltage (Vrrm)=600V, Max Surge Current=20A, Min Operating Temperature=-65°C, Package Quantity=1, Peak Reverse Current=1uA, Supplier Part Number 1=497-3241-1-ND, Category="Rectifier Diodes", Component=25, ComponentLink1Description=https://datasheet.ciiva.com/915/cd00002694-915858.pdf?src-supplier=Digi-Key, ComponentLink1URL=https://datasheet.ciiva.com/915/cd00002694-915858.pdf?src-supplier=Digi-Key, ComponentLink2Description=https://datasheet.ciiva.com/915/cd00002694-915859.pdf?src-supplier=Digi-Key, ComponentLink2URL=https://datasheet.ciiva.com/915/cd00002694-915859.pdf?src-supplier=Digi-Key, ComponentLink3Description=https://datasheet.ciiva.com/915/cd00002694-915860.pdf?src-supplier=Digi-Key, ComponentLink3URL=https://datasheet.ciiva.com/915/cd00002694-915860.pdf?src-supplier=Digi-Key, ComponentLink4Description=https://datasheet.ciiva.com/26818/getdatasheetpartid-65243-26818021.pdf?src-supplier=Verical, ComponentLink4URL=https://datasheet.ciiva.com/26818/getdatasheetpartid-65243-26818021.pdf?src-supplier=Verical, ComponentLink5Description=https://datasheet.ciiva.com/25949/cd00002694-25949159.pdf?src-supplier=Avnet+Europe, ComponentLink5URL=https://datasheet.ciiva.com/25949/cd00002694-25949159.pdf?src-supplier=Avnet+Europe, ComponentLink6Description=https://datasheet.ciiva.com/7964/1671053-7964013.pdf?src-supplier=Element14, ComponentLink6URL=https://datasheet.ciiva.com/7964/1671053-7964013.pdf?src-supplier=Element14, ComponentLink7Description=https://datasheet.ciiva.com/7964/1671053-7964014.pdf?src-supplier=Element14, ComponentLink7URL=https://datasheet.ciiva.com/7964/1671053-7964014.pdf?src-supplier=Element14, Contact Plating=Tin,Matte, Current Rating=1A, Element Configuration=Single, Forward Current=1A, Height=2.03mm, Lead Free="Lead Free", Length=4.6mm, Manufacturer Part Number=STTH1L06A, Max Reverse Voltage (DC)=600V, Mount="Surface Mount", Number of Pins=2, Output Current=1A, Packaging="Tape and Reel", Peak Non-Repetitive Surge Current=20A, Polarity=Standard, Pricing 1="1=0,38000, 10=0,30600, 25=0,27960, 100=0,17550, 500=0,16250, 1000=0,11050, 2500=0,10595 (USD)", Radiation Hardening=No, REACH SVHC="No SVHC", Recovery Time=80ns, Reverse Recovery Time=80ns, Reverse Voltage=600V, RoHS=Yes, Stock 1=40096, Supplier 1=Digi-Key, Supplier 2=Digi-Key, Supplier Part Number 2=MMSZ5251BT1GOSCT-ND, Voltage Rating (DC)=600V, Width=2.95mm
D4 D5 D6: library part RS1M-13-F, "Diode Switching 1KV 1A 2-Pin SMA T/R", Average Rectified Current=1A, Capacitance=15pF, Case/Package=SMA, Forward Voltage=1.3V, Manufacturer=Diodes, Max Forward Surge Current (Ifsm)=30A, Max Operating Temperature=150°C, Max Repetitive Reverse Voltage (Vrrm)=1kV, Min Operating Temperature=-65°C, Package Quantity=5000, Peak Reverse Current=5uA, Supplier Part Number 1=RS1M-FDICT-ND, Category="Rectifier Diodes", Component=30, ComponentLink1Description=https://datasheet.ciiva.com/22695/1911854-22695829.pdf?src-supplier=Element14, ComponentLink1URL=https://datasheet.ciiva.com/22695/1911854-22695829.pdf?src-supplier=Element14, ComponentLink2Description=https://datasheet.ciiva.com/8301/ds15002-8301719.pdf?src-supplier=Avnet, ComponentLink2URL=https://datasheet.ciiva.com/8301/ds15002-8301719.pdf?src-supplier=Avnet, ComponentLink3Description=https://datasheet.ciiva.com/15144/getdatasheetpartid-102368-15144828.pdf?src-supplier=Verical, ComponentLink3URL=https://datasheet.ciiva.com/15144/getdatasheetpartid-102368-15144828.pdf?src-supplier=Verical, ComponentLink4Description=https://datasheet.ciiva.com/25946/ds15002-25946237.pdf?src-supplier=Avnet+Europe, ComponentLink4URL=https://datasheet.ciiva.com/25946/ds15002-25946237.pdf?src-supplier=Avnet+Europe, Current=1A, Current Rating=1A, Element Configuration=Single, Forward Current=1A, Height=2.1mm, Lead Free="Lead Free", Length=4.6mm, Manufacturer Part Number=RS1M-13-F, Max Reverse Voltage (DC)=1kV, Max Surge Current=30A, Mount="Surface Mount", Number of Pins=2, Output Current=1A, Packaging="Tape and Reel", Peak Non-Repetitive Surge Current=30A, Polarity=Standard, Pricing 1="1=0,45000, 10=0,33900, 25=0,30560, 100=0,16110, 500=0,14276, 1000=0,11110, 2500=0,10166 (USD)", Radiation Hardening=No, REACH SVHC="No SVHC", Recovery Time=500ns, Reverse Recovery Time=500ns, Reverse Voltage (DC)=1kV, RoHS=Yes, Stock 1=175534, Supplier 1=Digi-Key, Voltage=1kV, Voltage Rating (DC)=1kV, Weight=0.002258oz, Width=2.92mm
D9 D10: library part RS1M-13-F, Average Rectified Current=1A, Capacitance=15pF, Case/Package=SMA, Forward Voltage=1.3V, Manufacturer=Diodes, Max Forward Surge Current (Ifsm)=30A, Max Operating Temperature=150°C, Max Repetitive Reverse Voltage (Vrrm)=1kV, Min Operating Temperature=-65°C, Package Quantity=5000, Peak Reverse Current=5uA, Supplier Part Number 1=RS1M-FDICT-ND, Category="Rectifier Diodes", Component=30, ComponentLink1Description=https://datasheet.ciiva.com/22695/1911854-22695829.pdf?src-supplier=Element14, ComponentLink1URL=https://datasheet.ciiva.com/22695/1911854-22695829.pdf?src-supplier=Element14, ComponentLink2Description=https://datasheet.ciiva.com/8301/ds15002-8301719.pdf?src-supplier=Avnet, ComponentLink2URL=https://datasheet.ciiva.com/8301/ds15002-8301719.pdf?src-supplier=Avnet, ComponentLink3Description=https://datasheet.ciiva.com/15144/getdatasheetpartid-102368-15144828.pdf?src-supplier=Verical, ComponentLink3URL=https://datasheet.ciiva.com/15144/getdatasheetpartid-102368-15144828.pdf?src-supplier=Verical, ComponentLink4Description=https://datasheet.ciiva.com/25946/ds15002-25946237.pdf?src-supplier=Avnet+Europe, ComponentLink4URL=https://datasheet.ciiva.com/25946/ds15002-25946237.pdf?src-supplier=Avnet+Europe, Current=1A, Current Rating=1A, Element Configuration=Single, Forward Current=1A, Height=2.1mm, Lead Free="Lead Free", Length=4.6mm, Manufacturer Part Number=RS1M-13-F, Max Reverse Voltage (DC)=1kV, Max Surge Current=30A, Mount="Surface Mount", Number of Pins=2, Output Current=1A, Packaging="Tape and Reel", Peak Non-Repetitive Surge Current=30A, Polarity=Standard, Pricing 1="1=0,45000, 10=0,33900, 25=0,30560, 100=0,16110, 500=0,14276, 1000=0,11110, 2500=0,10166 (USD)", Radiation Hardening=No, REACH SVHC="No SVHC", Recovery Time=500ns, Reverse Recovery Time=500ns, Reverse Voltage (DC)=1kV, RoHS=Yes, Stock 1=175534, Supplier 1=Digi-Key, Voltage=1kV, Voltage Rating (DC)=1kV, Weight=0.002258oz, Width=2.92mm
D11: library part BZX84C22LT1G, "DIODE ZENER 22V 225MW SOT23-3", Case/Package=SOT-23-3, Forward Current=10mA, Forward Voltage=900mV, Manufacturer="ON Semiconductor", Max Operating Temperature=150°C, Max Power Dissipation=225mW, Max Reverse Leakage Current=50nA, Min Operating Temperature=-65°C, Package Quantity=3000, Power Dissipation=300mW, Supplier Part Number 1=BZX84C22LT1GOSCT-ND, Test Current=5mA, Tolerance=6%, Voltage Rating (DC)=22V, Category="Zener Diodes", Component=27, ComponentLink1Description=https://datasheet.ciiva.com/30478/0900766b8121b438-30478464.pdf?src-supplier=RSComponents, ComponentLink1URL=https://datasheet.ciiva.com/30478/0900766b8121b438-30478464.pdf?src-supplier=RSComponents, ComponentLink2Description=https://datasheet.ciiva.com/15142/getdatasheetpartid-53776-15142130.pdf?src-supplier=Verical, ComponentLink2URL=https://datasheet.ciiva.com/15142/getdatasheetpartid-53776-15142130.pdf?src-supplier=Verical, ComponentLink3Description=https://datasheet.ciiva.com/894/bzx84c2v4lt1-d-894848.pdf?src-supplier=Digi-Key, ComponentLink3URL=https://datasheet.ciiva.com/894/bzx84c2v4lt1-d-894848.pdf?src-supplier=Digi-Key, ComponentLink4Description=https://datasheet.ciiva.com/894/bzx84c2v4lt1-d-894849.pdf?src-supplier=Digi-Key, ComponentLink4URL=https://datasheet.ciiva.com/894/bzx84c2v4lt1-d-894849.pdf?src-supplier=Digi-Key, ComponentLink5Description=https://datasheet.ciiva.com/894/bzx84c2v4lt1-d-894850.pdf?src-supplier=Digi-Key, ComponentLink5URL=https://datasheet.ciiva.com/894/bzx84c2v4lt1-d-894850.pdf?src-supplier=Digi-Key, ComponentLink6Description=https://datasheet.ciiva.com/25928/bzx84c2v4lt1-d-25928650.pdf?src-supplier=Avnet+Europe, ComponentLink6URL=https://datasheet.ciiva.com/25928/bzx84c2v4lt1-d-25928650.pdf?src-supplier=Avnet+Europe, ComponentLink7Description=https://datasheet.ciiva.com/10637/bzx84c2v4lt1-d-10637787.pdf?src-supplier=Avnet, ComponentLink7URL=https://datasheet.ciiva.com/10637/bzx84c2v4lt1-d-10637787.pdf?src-supplier=Avnet, Contact Plating=Tin,Matte, Element Configuration=Single, ESD Protection=Yes, Halogen Free="Halogen Free", Height=1.01mm, Lead Free="Lead Free", Length=3.04mm, Manufacturer Part Number=BZX84C22LT1G, Number of Pins=3, Packaging="Tape and Reel", Peak Reverse Current=50nA, Power Rating=225mW, Pricing 1="1=0,14000, 10=0,12300, 25=0,11760, 100=0,05170, 500=0,04060, 1000=0,02820 (USD)", Radiation Hardening=No, REACH SVHC="No SVHC", RoHS=Yes, Stock 1=46073, Supplier 1=Digi-Key, Voltage Tolerance=6%, Width=1.4mm, Working Voltage=22V, Zener Current=10mA, Zener Voltage=22V, Impedance=55R
D12: library part MMSZ22T1G, "Zener Diodes 22V 500mW", Case/Package=SOD-123-2, Forward Voltage=900mV, Manufacturer="ON Semiconductor", Max Operating Temperature=150°C, Max Power Dissipation=500mW, Max Reverse Leakage Current=50nA, Min Operating Temperature=-55°C, Package Quantity=3000, Supplier Part Number 1=MMSZ22T1GOSCT-ND, Test Current=5mA, Tolerance=5%, Voltage Rating (DC)=22V, Zener Current=10mA, Category="Zener Diodes", Component=28, ComponentLink1Description=https://datasheet.ciiva.com/25926/mmsz2v4t1-d-25926218.pdf?src-supplier=Avnet+Europe, ComponentLink1URL=https://datasheet.ciiva.com/25926/mmsz2v4t1-d-25926218.pdf?src-supplier=Avnet+Europe, ComponentLink2Description=https://datasheet.ciiva.com/6388/mmsz2v4t1-d-6388831.pdf?src-supplier=Digi-Key, ComponentLink2URL=https://datasheet.ciiva.com/6388/mmsz2v4t1-d-6388831.pdf?src-supplier=Digi-Key, Element Configuration=Single, Height=1.25mm, Lead Free="Lead Free", Length=2.84mm, Manufacturer Part Number=MMSZ22T1G, Number of Pins=2, Packaging="Tape and Reel", Peak Reverse Current=50nA, Power Dissipation=500mW, Power Rating=500mW, Pricing 1="1=0,21000, 10=0,19300, 25=0,18360, 100=0,08090, 500=0,06350, 1000=0,04410 (USD)", Radiation Hardening=No, RoHS=Yes, Stock 1=35139, Supplier 1=Digi-Key, Voltage Tolerance=5%, Width=1.8mm, Working Voltage=22V, Zener Voltage=22V, Impedance=55R
F1: library part 0034.3120, "SCHURTER - 0034.3120 - Fuse, Cartridge, Time Delay, 2 A, 250 V, 5mm x 20mm, 0.2\" x 0.79\", FST Series", Manufacturer=Schurter, Supplier Part Number 1=486-1219-ND, Category=Fuses, Component=9, Manufacturer Part Number=0034.3120, Mount="Holder,Surface Mount,Clip", Number of Pins=2, Pricing 1="1=0,44000, 50=0,36400, 100=0,27800, 500=0,21300, 1000=0,19440 (USD)", RoHS=Yes, Stock 1=9179, Supplier 1=Digi-Key, Weight=0.033158oz
IC1: library part TLE8102SG, "IC SWITCH LOSIDE 2CH DSO-12", Case/Package=SOIC, Manufacturer=Infineon, Max Operating Temperature=150°C, Max Output Current=6.5A, Max Supply Current=5mA, Min Dual Supply Voltage=48V, Min Operating Temperature=-40°C, On-State Resistance=180mR, Output Current=5A, Package Quantity=1, Supplier Part Number 1=726-TLE8102SG, Category="Hot Swap Controllers", Component=1, ComponentLink1Description=https://datasheet.ciiva.com/41458/001183484-da-01-en-ic-switch-loside-2c-tle8102sg-dso-12-inf-41458732.pdf?src-supplier=Conrad, ComponentLink1URL=https://datasheet.ciiva.com/41458/001183484-da-01-en-ic-switch-loside-2c-tle8102sg-dso-12-inf-41458732.pdf?src-supplier=Conrad, ComponentLink2Description=https://datasheet.ciiva.com/1955/infineon-tle8102sg-ds-v01-05-en-1955985.pdf?src-supplier=Digi-Key, ComponentLink2URL=https://datasheet.ciiva.com/1955/infineon-tle8102sg-ds-v01-05-en-1955985.pdf?src-supplier=Digi-Key, ComponentLink3Description=https://datasheet.ciiva.com/1955/infineon-tle8102sg-ds-v01-05-en-1955986.pdf?src-supplier=Digi-Key, ComponentLink3URL=https://datasheet.ciiva.com/1955/infineon-tle8102sg-ds-v01-05-en-1955986.pdf?src-supplier=Digi-Key, ComponentLink4Description=https://datasheet.ciiva.com/1955/infineon-tle8102sg-ds-v01-05-en-1955987.pdf?src-supplier=Digi-Key, ComponentLink4URL=https://datasheet.ciiva.com/1955/infineon-tle8102sg-ds-v01-05-en-1955987.pdf?src-supplier=Digi-Key, Halogen Free="Halogen Free", Manufacturer Part Number=TLE8102SG, Nominal Supply Current=5mA, Number of Channels=2, Number of Outputs=2, Number of Pins=12, Packaging="Tape and Reel", Pricing 1="1=5,69000, 10=4,84000, 100=4,19000, 250=3,98000, 500=3,57000, 1000=3,01000 (USD)", REACH SVHC="No SVHC", RoHS=Yes, Stock 1=4211, Supplier 1=Mouser, Interface=Serial
IC2: library part NC7WZ132K8X, "IC,NC7WZ132K8X,", High Level Output Current=-32mA, Low Level Output Current=32mA, Manufacturer="ON Semiconductor / Fairchild", Max Operating Temperature=85°C, Max Supply Voltage=5.5V, Min Operating Temperature=-40°C, Min Supply Voltage=1.65V, Package Quantity=3000, Quiescent Current=1uA, Supplier Part Number 1=512-NC7WZ132K8X, Category="Logic Gates", Component=4, ComponentLink1Description=https://datasheet.ciiva.com/4818/nc7wz132-97672-4818801.pdf?src-supplier=Mouser, ComponentLink1URL=https://datasheet.ciiva.com/4818/nc7wz132-97672-4818801.pdf?src-supplier=Mouser, ComponentLink2Description=https://datasheet.ciiva.com/8278/nc7wz132-8278945.pdf?src-supplier=Avnet, ComponentLink2URL=https://datasheet.ciiva.com/8278/nc7wz132-8278945.pdf?src-supplier=Avnet, ComponentLink3Description=https://datasheet.ciiva.com/15090/getdatasheetpartid-110777-15090731.pdf?src-supplier=Verical, ComponentLink3URL=https://datasheet.ciiva.com/15090/getdatasheetpartid-110777-15090731.pdf?src-supplier=Verical, ComponentLink4Description=https://datasheet.ciiva.com/34301/1027871-34301887.pdf?src-supplier=Jameco, ComponentLink4URL=https://datasheet.ciiva.com/34301/1027871-34301887.pdf?src-supplier=Jameco, ComponentLink5Description=https://datasheet.ciiva.com/26865/nc7wz132k8x-26865071.pdf?src-supplier=IIIC, ComponentLink5URL=https://datasheet.ciiva.com/26865/nc7wz132k8x-26865071.pdf?src-supplier=IIIC, ComponentLink6Description=https://datasheet.ciiva.com/1868/nc7wz132-1868154.pdf?src-supplier=Digi-Key, ComponentLink6URL=https://datasheet.ciiva.com/1868/nc7wz132-1868154.pdf?src-supplier=Digi-Key, ComponentLink7Description=https://datasheet.ciiva.com/1868/nc7wz132-1868155.pdf?src-supplier=Digi-Key, ComponentLink7URL=https://datasheet.ciiva.com/1868/nc7wz132-1868155.pdf?src-supplier=Digi-Key, ComponentLink8Description=https://datasheet.ciiva.com/1868/nc7wz132-1868156.pdf?src-supplier=Digi-Key, ComponentLink8URL=https://datasheet.ciiva.com/1868/nc7wz132-1868156.pdf?src-supplier=Digi-Key, Contact Plating=Tin,Matte, Height=0.7mm, Lead Free="Lead Free", Length=2.3mm, Logic Function=NAND, Manufacturer Part Number=NC7WZ132K8X, Mount="Surface Mount", Number of Circuits=2, Number of Elements=2, Number of Gates=2, Number of Outputs=1, Number of Pins=8, Number of Terminals=8, Number of Inputs=2, Output Current=32mA, Packaging="Tape and Reel", Pricing 1="1=0,46000, 10=0,33900, 100=0,18900, 1000=0,14200, 3000=0,12200, 9000=0,11400 (USD)", Propagation Delay=13ns, Radiation Hardening=No, REACH SVHC="No SVHC", RoHS=Yes, Schmitt Trigger Input=No, Stock 1=3369, Supplier 1=Mouser, Turn-On Delay Time=6.3ns, Weight=0.03g, Width=2mm
L1: library part 744272392, "WURTH ELEKTRONIK - 744272392 - Filter, Netzfilter, Oberflächenmontage, 2X3900µH, WE-SL5, 9.6 kOhm, 520mA, 10mm x 8.7mm x 6.5mm", Case/Package=SMD/SMT, Current=520mA, DC Resistance (DCR)=540mR, Manufacturer="Wurth Electronics", Max Operating Temperature=125°C, Min Operating Temperature=-40°C, Package Quantity=1, Self Resonant Frequency=100kHz, Supplier Part Number 1=710-744272392, Tolerance=40%, Voltage Rating=80V, Inductance=3.9mH, Category="Common Mode Chokes", Component=3, ComponentLink1Description=https://datasheet.ciiva.com/7764/1735670-7764962.pdf?src-supplier=Element14, ComponentLink1URL=https://datasheet.ciiva.com/7764/1735670-7764962.pdf?src-supplier=Element14, ComponentLink2Description=https://datasheet.ciiva.com/7265/744272392-7265012.pdf?src-supplier=Newark, ComponentLink2URL=https://datasheet.ciiva.com/7265/744272392-7265012.pdf?src-supplier=Newark, ComponentLink3Description=https://datasheet.ciiva.com/6048/1696178-6048502.pdf?src-supplier=Farnell, ComponentLink3URL=https://datasheet.ciiva.com/6048/1696178-6048502.pdf?src-supplier=Farnell, ComponentLink4Description=https://datasheet.ciiva.com/17069/0900766b80596bb6-17069704.pdf?src-supplier=Allied+Electronics, ComponentLink4URL=https://datasheet.ciiva.com/17069/0900766b80596bb6-17069704.pdf?src-supplier=Allied+Electronics, ComponentLink5Description=https://datasheet.ciiva.com/4952/744272392-25143-4952443.pdf?src-supplier=Mouser, ComponentLink5URL=https://datasheet.ciiva.com/4952/744272392-25143-4952443.pdf?src-supplier=Mouser, ComponentLink6Description=https://datasheet.ciiva.com/6216/744272392-6216197.pdf?src-supplier=Digi-Key, ComponentLink6URL=https://datasheet.ciiva.com/6216/744272392-6216197.pdf?src-supplier=Digi-Key, ComponentLink7Description=https://datasheet.ciiva.com/6216/744272392-6216199.pdf?src-supplier=Digi-Key, ComponentLink7URL=https://datasheet.ciiva.com/6216/744272392-6216199.pdf?src-supplier=Digi-Key, ComponentLink8Description=https://datasheet.ciiva.com/26308/744272392-eng-tds-26308748.pdf?src-supplier=Distrelec, ComponentLink8URL=https://datasheet.ciiva.com/26308/744272392-eng-tds-26308748.pdf?src-supplier=Distrelec, Core Material=Ferrite, Current Rating=520mA, Depth=8.7mm, Height=6.5mm, Lead Free="Lead Free", Length=0.394inch, Manufacturer Part Number=744272392, Max Current Rating=520mA, Max DC Current=520mA, Mount="Surface Mount", Number of Lines=2, Number of Pins=4, Packaging="Tape and Reel", Pricing 1="1=3,14000, 10=2,91000, 25=2,91000, 50=2,63000, 100=2,54000, 250=2,54000 (USD)", REACH SVHC="No SVHC", Resistance=540mR, RoHS=Yes, Stock 1=1253, Supplier 1=Mouser, Termination=SMD/SMT, Test Frequency=100kHz, Voltage Rating (DC)=80V, Weight=0.026103oz, Width=0.343inch, Impedance=9.6kR, Inductance Tolerance=40%